# Altium PCB CT310高端控制盒基板电路V1.0.PcbDoc (part 3 of 8)
Units mil, origin at the board's own origin, x right, y up, seen from the top; angles counter-clockwise.
Board outline 8162.61 x 6196.81 mil, 2 copper layers (Top Layer, Bottom Layer), stack 65.792 mil thick; 265 components, 178 nets, 926 pads, 298 vias.
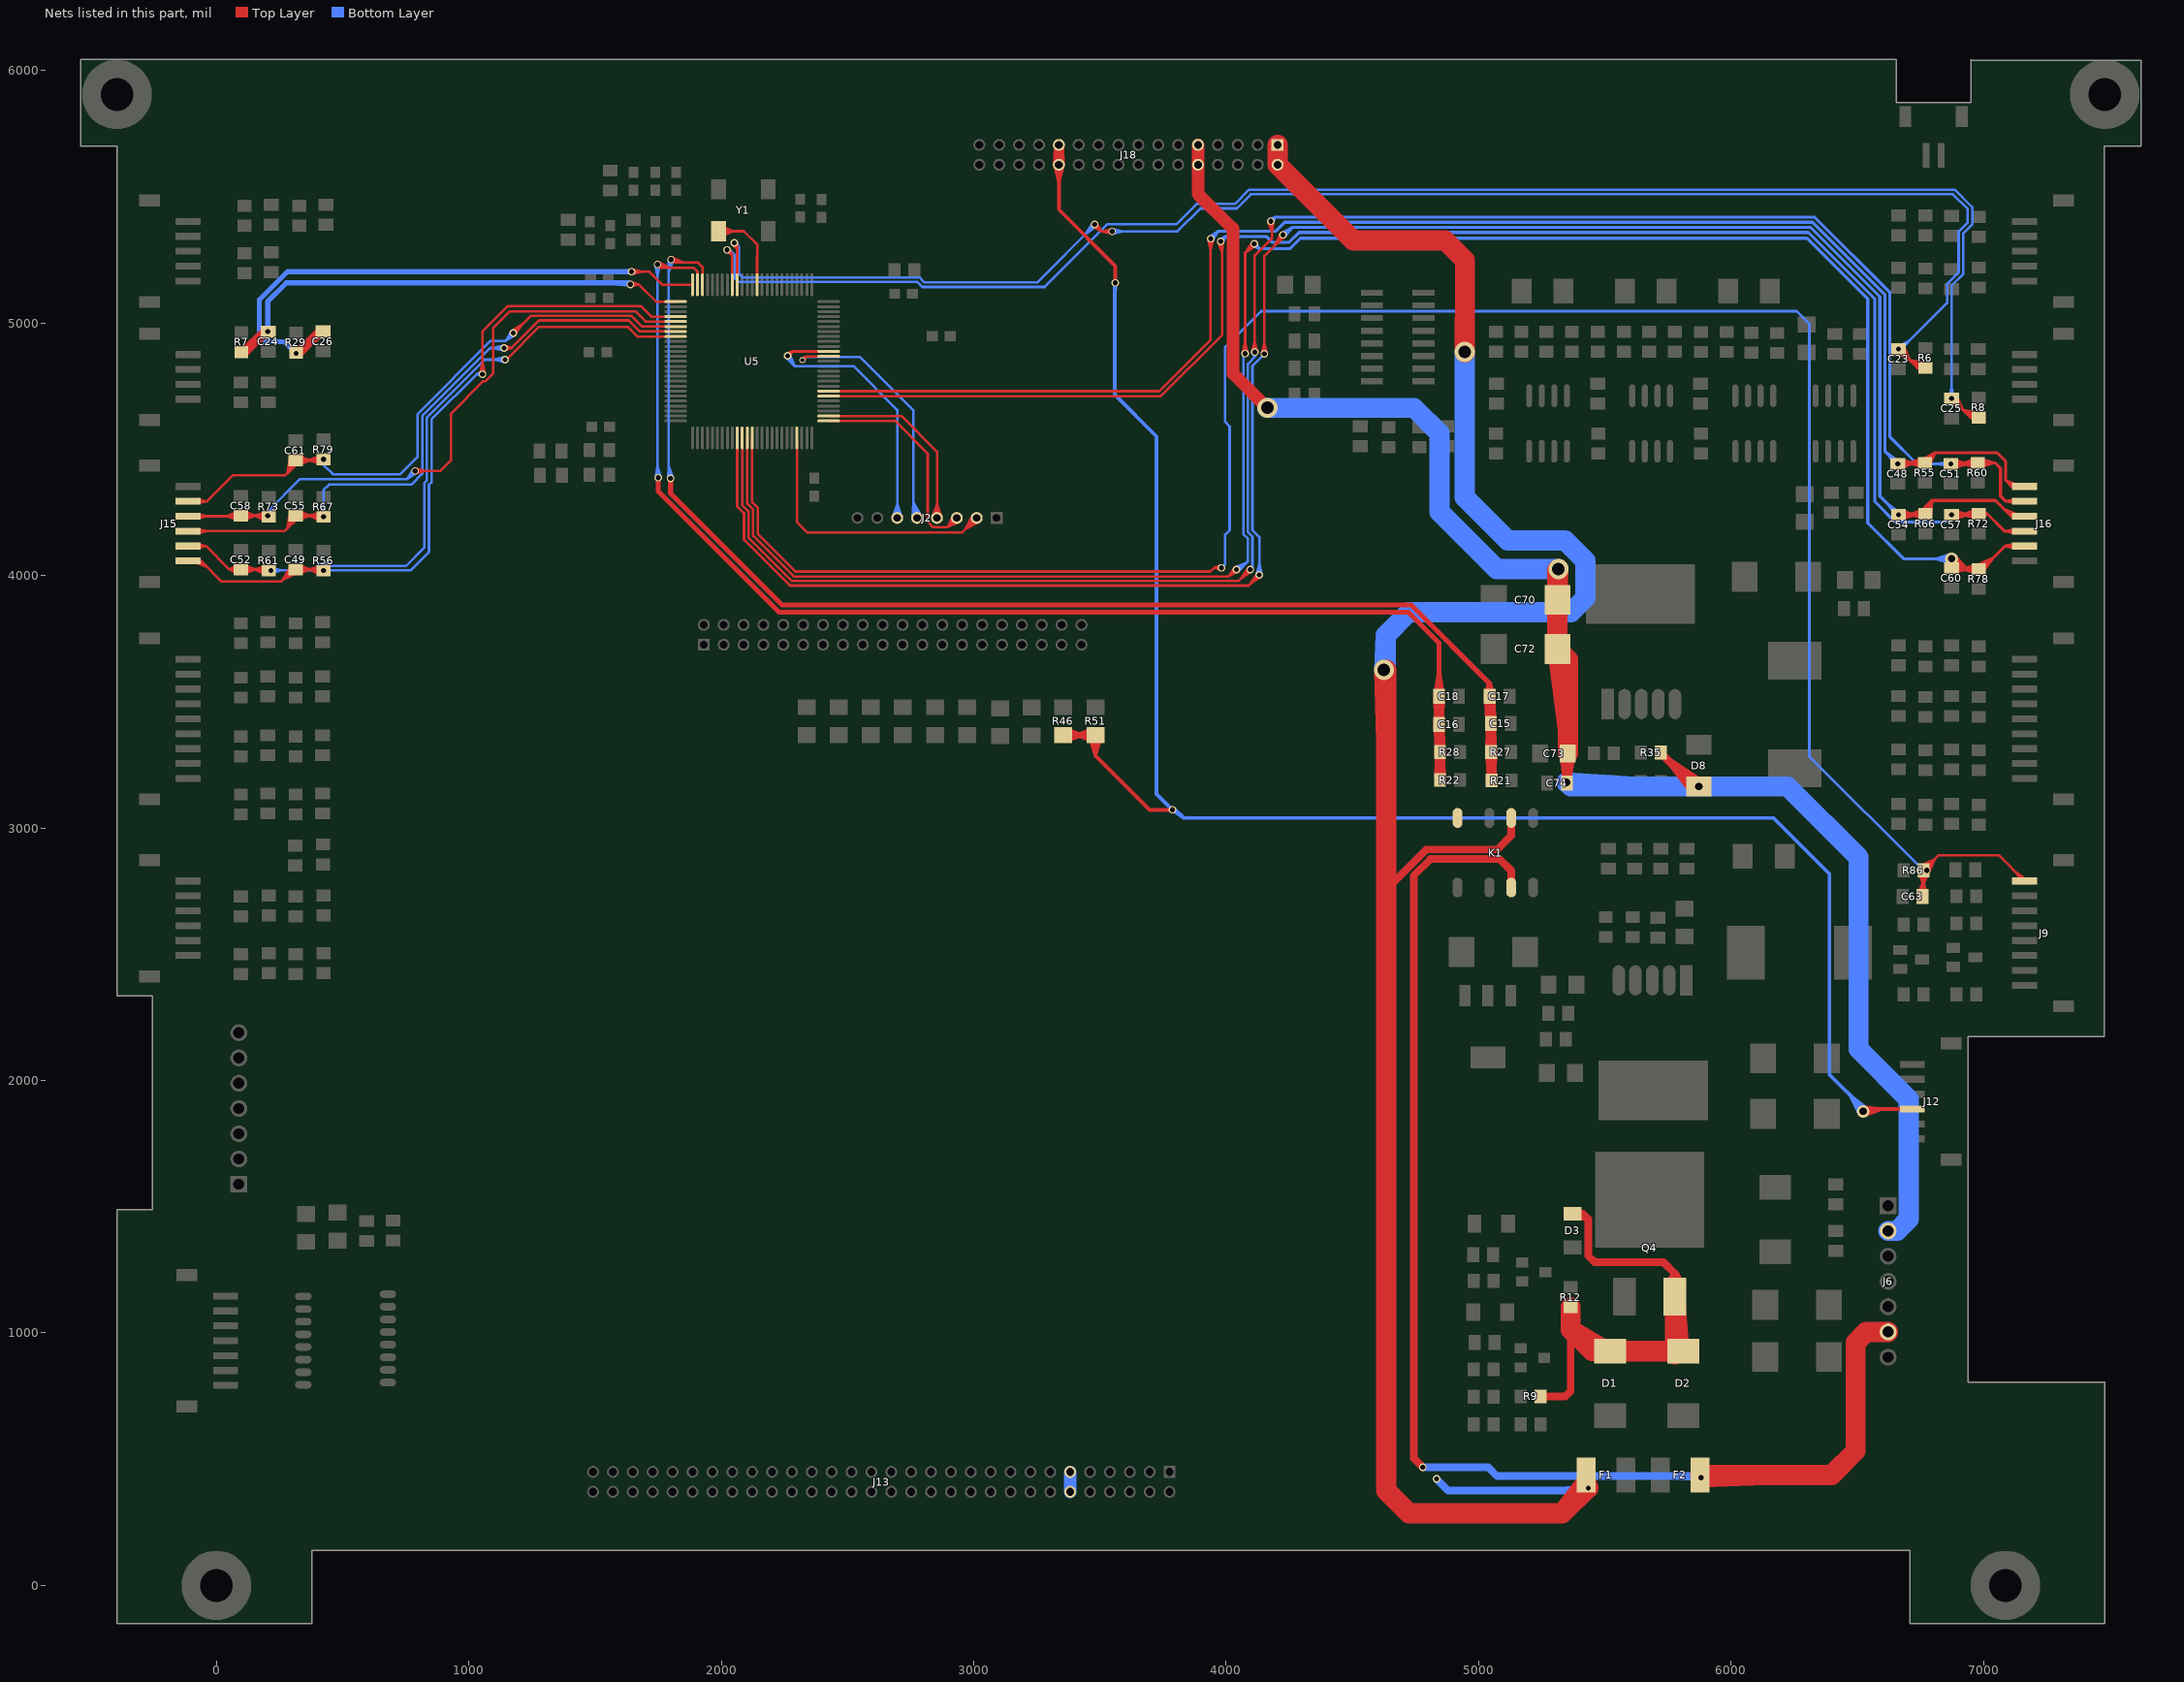
[diagram p3: the nets of this part, all layers, seen from the top]

## Via types
v1: diameter 30, hole 20, Top Layer to Bottom Layer, tented both sides, 226 vias
v2: diameter 60, hole 30, Top Layer to Bottom Layer, tented both sides, 32 vias
v3: diameter 50, hole 30, Top Layer to Bottom Layer, tented both sides, 20 vias
v4: diameter 80, hole 50, Top Layer to Bottom Layer, tented both sides, 10 vias
v5: diameter 50, hole 28, Top Layer to Bottom Layer, tented both sides, 8 vias
v6: diameter 24, hole 16, Top Layer to Bottom Layer, tented both sides, 1 vias
v7: diameter 30, hole 16, Top Layer to Bottom Layer, tented both sides, 1 vias

## Nets (pads, with @x,y where several pads share a name; then routed paths per layer and width w, separated by ;. In a path a pad name is that pad's centre, name@x,y a point inside that pad or via, vN(x,y) a via of type N, cw(c..) or ccw(c..) an arc to the next point about the centre after c; other vN are vias at no path point) (continued)
+7.2V_S: C70.1 C72.1 C73.1 C74.2 D8.2 J6.2 J18.9 J18.10 R35.1 | length 12030.7
  Top Layer w30: R35.1@5721.67,3294.36 5808.93,3211.03 ; R35.1@5721.67,3298.3 5855.34,3164.62 v3(5872.3,3164.62) ; 5768.56,3248 v3(5872.3,3164.62) ; 5775.01,3244.95 v3(5872.3,3164.62) ; 5776.87,3249.68 v3(5872.3,3164.62) ; 5777.49,3243.81 v3(5872.3,3164.62) ; D8.2@5862.45,3164.62 5757.78,3262.18 ; D8.2@5877.49,3183.8 5757.78,3262.18 ; v3(5348.3,3181.3) 5369.81,3289.52 C74.2@5349.67,3184.2 ; v3(5348.3,3181.3) 5369.81,3289.56 C74.2@5349.67,3181.3 ; v3(5348.3,3181.3) C73.1@5353.41,3291.36 ; v3(5348.3,3181.3) 5336.93,3290.67 C74.2@5349.67,3184.2 ; v3(5348.3,3181.3) C73.1@5353.41,3291.36 ; v3(5348.3,3181.3) 5336.93,3290.68 C74.2@5349.67,3181.3 ; v3(5348.3,3181.3) C73.1@5349.67,3291.55 ; v3(5348.3,3181.3) C73.1@5349.67,3291.55 ; C74.2@5349.67,3181.3 C73.1@5353.41,3291.36 ; C74.2@5349.67,3181.3 C73.1@5349.67,3291.55 ; C74.2@5349.67,3184.2 C73.1@5353.41,3291.36 ; C74.2@5349.67,3184.2 C73.1@5349.67,3291.55 ; 5757.78,3262.18 5844.38,3148.27 v3(5872.3,3164.62)
  Top Layer w50: J18.10@3888.4,5626.93 J18.9@3888.4,5705.67 J18.10@3888.4,5626.93 ; J18.10@3888.4,5626.93 3888.4,5510.6 4023,5376 4027,5376 4027,4800 ; 4027,4800 v4(4163,4664) 4027,4800
  Top Layer w80: C72.1@5311.98,3701.13 5353.41,3387.92 ; C73.1@5353.41,3295.3 5353.41,3667.57 C72.1@5311.98,3709 ; C73.1@5353.41,3299.23 5353.41,3570.73 ; C72.1@5311.98,3709 5311.98,3895.42 5311.98,3716.87 C70.1@5311.98,3903.3 ; C72.1@5311.98,3709 C70.1@5311.98,3903.3 ; C70.1@5311.98,3903.3 v4(5316,4026) ; C70.1@5311.98,3903.3 v4@5311.98,4021.98 ; v4@5311.98,4021.98 5311.98,3911.17 v4(5316,4026) ; v4@5311.98,4021.98 v4(5316,4026)
  Bottom Layer w80: v4(4163,4664) 4744,4664 4845,4563 4845,4252 5071,4026 ; 5607.3,3164.62 v3(5872.3,3164.62) ; 5622.9,3164.62 v3(5348.3,3181.3) 5364.97,3164.62 v3(5872.3,3164.62) ; 5071,4026 v4(5316,4026) 5071,4026 ; v3(5872.3,3164.62) 6223.41,3164.62 6505,2883.02 6505,2124.02 6703.46,1925.56 6703.46,1450.65 6656.81,1404 ; 6656.81,1404 J6.2@6622,1404 6656.81,1404
BAT1+: F1.1 J18.1 J18.2 K1.6 | length 10438.7
  Top Layer w30: 4634,2755.74 4793.26,2915 5074,2915 5128.99,2969.99 ; K1.6@5128.99,3020.11 5128.99,2969.99 ; K1.6@5128.99,3039.8 5128.99,2969.99
  Top Layer w80: v4(4625,3626) 4634,3345.09 ; v4@4634,3626 4634,2755.74 4634,375.55 4724.55,285 5331,285 ; 4946,5165.01 v4(4945,4885) 4946,4884 4946,5248 4867,5327 4503.29,5327 J18.2@4203.37,5626.93 ; F1.1@5426.55,380.55 5331,285 ; J18.2@4203.37,5626.93 J18.1@4203.37,5705.67 J18.2@4203.37,5626.93 ; 5331,285 v1(5434,385) ; 5331,285 v1(5434,385) ; 5331,285 5426.55,405.8 v1(5434,385)
  Bottom Layer w30: v1(4833,422) 4879,376 5425,376 v1(5434,385) 5324.38,376
  Bottom Layer w80: v4(4945,4885) 4945,4309 5115,4139 5342,4139 5423,4058 5423,3911 5366,3854 4723,3854 4632,3763 ; 4632,3763 v4(4625,3626) 4632,3633 4632,3763
BAT1_ADC: C15.1 C17.1 R21.2 R27.2 U5.23 | length 9670.8
  Top Layer w10: v1@1799.63,5241.09 1849.07,5239.3 ; v1@1804.34,5260.43 1849.07,5239.3 ; U5.23@1925.45,5151.44 1925.45,5222.14 ; U5.23@1925.45,5190.69 1925.45,5222.14 ; v1(1801,5251) 1816.7,5239.3 ; v1(1801,5251) 1849.07,5239.3 ; v1(1801,5251) 1816.7,5239.3 ; v1(1801,5251) 1805,5251 1816.7,5239.3 ; 1816.7,5239.3 1797.27,5241.72 1816.7,5239.3 ; 1816.7,5239.3 1808.82,5257.23 1816.7,5239.3 ; 1816.7,5239.3 1908.3,5239.3 1925.45,5222.14
  Top Layer w20: C17.1@5029.87,3529.26 5043.33,3572.26 ; C17.1@5029.92,3513.03 C15.1@5051.33,3430.57 ; C15.1@5034.72,3419.68 C17.1@5044.48,3503.28 ; C15.1@5034.79,3417.75 C17.1@5032.51,3503.05 ; C15.1@5034.81,3405.8 R27.2@5051.33,3323.65 ; C15.1@5034.81,3420.79 C17.1@5051.33,3502.9 ; C15.1@5034.92,3421.56 C17.1@5056.1,3502.68 ; R27.2@5035.72,3296.66 R21.2@5040.64,3210.85 ; R27.2@5035.73,3303.53 C15.1@5038.09,3389.49 ; R27.2@5035.75,3305.28 C15.1@5049.02,3388.38 ; R27.2@5035.79,3305.66 C15.1@5051.33,3387.91 ; R27.2@5035.99,3306.97 C15.1@5059.49,3387.52 ; R27.2@5036.06,3293.28 R21.2@5061.68,3212.99 ; R21.2@5037.76,3193.34 R27.2@5051.33,3275.85 ; C17.1@5043.33,3515.39 C15.1@5051.33,3430.57 ; C17.1@5043.33,3527.2 5043.33,3572.26 ; C15.1@5048.33,3407.39 R27.2@5051.33,3323.65 ; R21.2@5051.33,3188.3 5051.33,3513.3 C17.1@5043.33,3521.3 5043.33,3572.26 ; R21.2@5051.33,3192.23 R27.2@5051.33,3275.85 ; C17.1@5056.8,3529.26 5043.33,3572.26 ; C17.1@5056.96,3515.58 C15.1@5051.33,3430.57 ; C15.1@5061.48,3422.79 C17.1@5032.51,3503.05 ; C15.1@5061.85,3420.92 C17.1@5044.48,3503.28 ; C15.1@5061.94,3406.77 R27.2@5051.33,3323.65 ; C15.1@5061.94,3419.82 C17.1@5051.33,3502.9 ; C15.1@5061.96,3419.04 C17.1@5056.1,3502.68 ; R27.2@5062.66,3307.08 C15.1@5038.09,3389.49 ; R27.2@5062.73,3293.91 R21.2@5040.64,3210.85 ; R27.2@5062.93,3297.26 R21.2@5061.68,3212.99 ; R27.2@5062.95,3303.69 C15.1@5059.49,3387.52 ; R27.2@5062.93,3305.02 C15.1@5051.33,3387.91 ; R27.2@5062.91,3305.39 C15.1@5049.02,3388.38 ; R21.2@5064.91,3193.34 R27.2@5051.33,3275.85 ; 1799,4324.46 v1(1799,4385) 1799,4324.46 ; 1799,4324.46 2240.46,3883 4732.6,3883 5043.33,3572.26 ; C17.1@5032.51,3503.05 C15.1@5048.33,3419.2 ; C15.1@5038.09,3389.49 R27.2@5049.33,3304.23 ; R21.2@5040.64,3210.85 R27.2@5049.33,3296.36 ; C17.1@5044.48,3503.28 C15.1@5048.33,3419.2 ; C15.1@5048.33,3419.2 C17.1@5051.33,3502.9 ; C15.1@5048.33,3419.2 C17.1@5056.1,3502.68 ; C15.1@5049.02,3388.38 R27.2@5049.33,3304.23 ; R27.2@5049.33,3296.36 R21.2@5051.33,3212.7 ; R27.2@5049.33,3296.36 R21.2@5051.33,3212.4 ; R27.2@5049.33,3296.36 R21.2@5061.68,3212.99 ; R27.2@5049.33,3304.23 C15.1@5059.49,3387.52 ; R27.2@5049.33,3304.23 C15.1@5051.33,3387.91 ; R21.2@5051.33,3212.4 5035.79,3294.93 R21.2@5051.33,3212.7 ; R21.2@5051.33,3212.4 5062.93,3295.58 R21.2@5051.33,3212.7
  Bottom Layer w10: v1@1789.01,4384.59 1792,4433.13 ; v1@1791.03,5251.8 1792,5201.31 ; v1(1799,4385) 1792,4433.13 ; v1@1801,4385 1792,4394 1792,5242 v1(1801,5251) 1792,5201.31 ; v1@1808.7,4387.45 1792,4433.13 ; v1@1810.61,5248.25 1792,5201.31
BAT2+: F2.1 J6.6 K1.3 | length 6151.2
  Top Layer w30: v1(4779,468) 4742.63,504.37 4742.63,2810.63 4809,2877 5083,2877 5128.99,2831.01 ; K1.3@5128.99,2764.2 5128.99,2831.01 ; K1.3@5128.99,2783.89 5128.99,2831.01
  Top Layer w80: F2.1@5877.03,437.3 6154.44,437.3 ; F2.1@5881,437.3 6398.3,437.3 6493,532 6493,962 6535,1004 J6.6@6622,1004 ; 6138.35,437.3 v1(5881,427) 6139.03,437.3
  Bottom Layer w30: v1(4779,468) 5038,468 5073,433 5875,433 v1(5881,427) 5774.24,433
BAT2_ADC: C16.1 C18.1 R22.2 R28.2 U5.24 | length 9443.5
  Top Layer w10: v1@1745.28,5222.15 1796.39,5218.3 ; v1@1746,5232 v1(1747,5232) 1796.39,5218.3 ; v1@1746.5,5231.5 1759.7,5218.3 1891.3,5218.3 1905.76,5203.83 ; v1@1750.6,5241.33 1796.39,5218.3 ; U5.24@1905.76,5151.44 1905.76,5203.83 ; U5.24@1905.76,5190.69 1905.76,5203.83
  Top Layer w20: v1(1750,4387) 1750,4333.86 2228.86,3855 4721,3855 4843.33,3732.67 C18.1@4843.33,3521.3 4847.27,3517.36 R28.2@4847.27,3301.28 R22.2@4847.27,3190.3 ; C16.1@4829.71,3404.51 R28.2@4835.83,3319.31 ; C18.1@4829.73,3516.04 C16.1@4832.43,3430.21 ; C18.1@4829.77,3514.18 C16.1@4844.03,3430.95 ; C18.1@4829.76,3528.31 4843.33,3610.82 ; C16.1@4829.82,3417.95 C18.1@4847.27,3499.97 ; C18.1@4829.82,3513.65 C16.1@4847.27,3431.54 ; C18.1@4830.05,3512.39 C16.1@4855.14,3432.22 ; C16.1@4830.17,3400.89 R28.2@4858.33,3321.62 ; R22.2@4833.66,3193.62 R28.2@4836.65,3278.29 ; R28.2@4833.69,3296.24 R22.2@4847.27,3213.73 ; R28.2@4833.69,3306.33 C16.1@4847.27,3388.84 ; R22.2@4833.94,3197.02 R28.2@4857.9,3278.29 ; C16.1@4843.33,3416.21 C18.1@4847.27,3499.97 ; C18.1@4843.33,3527.2 4843.33,3610.82 ; R28.2@4847.27,3297.35 R22.2@4847.27,3213.73 ; R28.2@4847.27,3305.22 C16.1@4847.27,3388.84 ; C18.1@4856.67,3512.59 C16.1@4832.43,3430.21 ; C16.1@4856.77,3402.13 R28.2@4835.83,3319.31 ; C16.1@4856.89,3405.74 R28.2@4858.33,3321.62 ; C16.1@4856.95,3416.68 C18.1@4847.27,3499.97 ; C18.1@4856.92,3514.4 C16.1@4844.03,3430.95 ; C18.1@4856.95,3514.92 C16.1@4847.27,3431.54 ; C18.1@4856.93,3516.2 C16.1@4855.14,3432.22 ; C18.1@4856.91,3528.31 4843.33,3610.82 ; R22.2@4860.61,3197.02 R28.2@4836.65,3278.29 ; R28.2@4860.85,3296.24 R22.2@4847.27,3213.73 ; R28.2@4860.85,3306.33 C16.1@4847.27,3388.84 ; R22.2@4860.88,3193.62 R28.2@4857.9,3278.29 ; C16.1@4832.43,3430.21 C18.1@4843.33,3515.39 ; R28.2@4835.83,3319.31 C16.1@4843.33,3404.4 ; R28.2@4836.65,3278.29 R22.2@4847.27,3194.23 ; C16.1@4843.33,3404.4 R28.2@4847.27,3320.64 ; C16.1@4843.33,3404.4 R28.2@4847.27,3320.3 ; C16.1@4843.33,3404.4 R28.2@4858.33,3321.62 ; C18.1@4843.33,3515.39 C16.1@4847.27,3431.54 ; C18.1@4843.33,3515.39 C16.1@4844.03,3430.95 ; C18.1@4843.33,3515.39 C16.1@4855.14,3432.22 ; R22.2@4847.27,3194.23 R28.2@4847.27,3277.85 ; R22.2@4847.27,3194.23 R28.2@4857.9,3278.29 ; R22.2@4847.27,3194.23 R28.2@4847.27,3277.85 ; R28.2@4847.27,3277.85 4860.85,3195.34 R28.2@4847.27,3277.85 ; R28.2@4847.27,3277.85 4833.69,3195.34 R28.2@4847.27,3277.85 ; R28.2@4847.27,3320.3 4829.82,3402.66 R28.2@4847.27,3320.64 ; R28.2@4847.27,3320.3 4856.95,3403.93 R28.2@4847.27,3320.64
  Bottom Layer w10: v1@1737.06,5230.89 1747,5187 v1@1756.94,5230.89 ; v1@1740.01,4387.44 1747,4432.29 ; v1@1747,4387 v1(1747,5232) ; v1(1750,4387) 1747,4432.29 ; v1@1759.84,4388.76 1747,4432.29
BAT_IN: D1.2 D2.2 D3.2 Q4.3 R9.2 R12.1 | length 3830.8
  Top Layer w30: R9.2@5245.67,748.3 5343.3,748.3 5364.41,769.41 5364.41,1012.4 ; D3.2@5371.3,1472.22 5412.78,1472.22 ; Q4.3@5747.57,1180.53 5777.3,1235.3 ; Q4.3@5777.3,1143.65 5777.3,1235.3 ; Q4.3@5777.3,1172.98 5777.3,1235.3 ; Q4.3@5807.02,1180.53 5777.3,1235.3 ; D3.2@5379.17,1472.22 5412.78,1472.22 ; D3.2@5379.17,1472.22 5412.78,1472.22 ; D3.2@5379.17,1472.22 5434,1451 ; 5412.78,1472.22 5434,1451 ; 5434,1451 5434,1306 5459.7,1280.3 5732.3,1280.3 5777.3,1235.3
  Top Layer w80: D1.2@5520.29,928.25 5448.56,928.25 ; 5364.41,1012.4 D1.2@5506.51,928.25 ; 5364.41,1012.4 R12.1@5364.41,1101.99 5364.41,1012.4 ; 5364.41,1012.4 5448.56,928.25 ; 5448.56,928.25 D1.2@5506.51,928.25 ; 5448.56,928.25 D1.2@5506.51,928.25 ; D2.2@5796.52,928.25 5534.07,928.25 5782.3,927.25 5552.29,927.25 D2.2@5796.52,928.25 ; D2.2@5796.52,928.25 Q4.3@5777.3,1143.65 5777.3,915.25 5777.3,1114.32 D2.2@5796.52,928.25
CLOCK: U5.12 Y1.3 | length 608.9
  Top Layer w10: Y1.3@1988.87,5363.62 2088.98,5363.62 2143,5309.6 2143,5265.4 2141.98,5264.38 U5.12@2141.98,5151.44 ; Y1.3@1990.64,5349.2 2048.4,5363.62 ; Y1.3@1990.64,5378.04 2048.4,5363.62 ; Y1.3@1993.92,5339.62 2048.4,5363.62 ; Y1.3@1993.92,5387.62 2048.4,5363.62 ; U5.12@2141.98,5190.69 2141.98,5226.44
CVBS: J12.4 J18.23 J18.24 R46.2 R51.2 | length 10038.4
  Top Layer w15: J18.24@3321.16,5625.56 J18.23@3323.37,5694.78 ; J18.24@3321.21,5625.03 3337.22,5558.3 J18.24@3353.23,5625.03 ; J18.24@3321.21,5628.82 3337.22,5695.55 J18.24@3353.23,5628.82 ; J18.23@3321.21,5703.77 3337.22,5637.04 J18.23@3353.23,5703.77 ; J18.24@3321.91,5631.97 J18.23@3351.08,5694.78 ; J18.23@3337.22,5705.67 J18.24@3337.22,5626.93 ; J18.24@3352.54,5631.97 J18.23@3323.37,5694.78 ; J18.24@3353.29,5625.56 J18.23@3351.08,5694.78 ; R46.2@3354.92,3367.88 R51.2@3482,3367.88 3482,3285.88 3696.88,3071 3786,3071 v1(3787,3072) 3726.98,3071 ; R46.2@3358.86,3367.88 3435.35,3367.88 ; R46.2@3359.39,3358.9 3435.35,3367.88 ; R46.2@3359.39,3376.86 3435.35,3367.88 ; R46.2@3362.62,3344.18 3435.35,3367.88 ; R46.2@3362.62,3391.58 3435.35,3367.88 ; R51.2@3458.3,3364.12 3482,3291.39 ; R51.2@3473.02,3367.35 3482,3291.39 ; R51.2@3474.3,3344.18 3401.57,3367.88 ; R51.2@3474.3,3391.58 3401.57,3367.88 ; R51.2@3477.53,3358.9 3401.57,3367.88 ; R51.2@3477.53,3376.86 3401.57,3367.88 ; R51.2@3478.06,3367.88 3401.57,3367.88 ; R51.2@3490.98,3367.35 3482,3291.39 ; R51.2@3505.7,3364.12 3482,3291.39 ; v1(3561,5159) 3561,5219 ; v1@3561,5163.87 3561,5225.27 3337.22,5449.04 J18.24@3337.22,5626.93 ; v3@6523.07,1895.5 6594.57,1886.47 ; v3@6527.15,1861 6594.57,1886.47 ; 6623.02,1886.47 J12.4@6681.8,1886.47 ; J12.4@6717.23,1886.47 6531.47,1886.47 v3(6523,1878) 6594.57,1886.47 ; J18.23@3323.37,5694.78 J18.24@3337.22,5626.93 ; J18.24@3337.22,5626.93 J18.23@3351.08,5694.78
  Bottom Layer w15: 3558.5,5098.79 v1(3561,5159) ; v1@3560,5159 3558.5,5157.5 3558.5,4716.5 3724.5,4550.5 3724.5,3134.5 v1(3787,3072) ; 3740.18,3118.82 v1(3787,3072) ; v1@3788,3076 3795.94,3076 3832.44,3039.5 ; v3@6508.27,1868.55 6472.54,1940.46 ; v3@6535.33,1890.42 6472.54,1940.46 ; v1(3787,3072) 3832.44,3039.5 ; 3832.44,3039.5 6168.44,3039.5 6389.5,2818.44 6389.5,2023.5 6523,1890 v3(6523,1878) 6472.54,1940.46
DC33V: J13.11 J13.12 | length 78.7
  Bottom Layer w50: J13.12@3381.96,370.69 J13.11@3381.96,449.43
GND_P: K1.8
JNRST: J2.6 U5.90 | length 1580.4
  Top Layer w10: v1@2257.49,4878.34 2280.66,4887.66 ; v1(2263,4870) 2280.66,4887.66 ; v1@2271.34,4864.49 2280.66,4887.66 ; 2350.44,4887.66 U5.90@2386.19,4887.66 ; U5.90@2425.44,4887.66 2280.66,4887.66
  Bottom Layer w10: v1@2255.36,4863.55 2291.65,4828.35 ; v1@2271.76,4874.82 2291.65,4828.35 ; J2.6@2678.55,4231.23 2696.89,4281.62 ; J2.6@2688.3,4228.69 2696.89,4281.62 ; J2.6@2696.89,4228 2696.89,4656.11 2524,4829 2332.36,4829 2331.65,4828.3 2291.7,4828.3 2263,4857 v1(2263,4870) 2291.65,4828.35 ; J2.6@2705.48,4228.69 2696.89,4281.62 ; J2.6@2715.23,4231.23 2696.89,4281.62
JOYSTICK_LEFTX: C23.1 R6.1 U5.16 | length 8616.4
  Top Layer w10: v1@2043.75,5312.35 2063.24,5292.76 ; v1@2061.72,5320.35 2063.24,5292.76 ; U5.16@2063.24,5151.44 2063.24,5292.76 ; U5.16@2063.24,5190.69 2063.24,5226.44 ; v1@3472.92,5382.06 3506,5363 ; v1(3479,5390) 3506,5363 ; v1@3486.94,5396.08 3506,5363 ; v1@3546.81,5353.07 3506,5363 ; v1@3546.81,5372.93 3506,5363 ; C23.1@6656.59,4889.3 6700.26,4856.62 ; C23.1@6656.81,4889.11 6699.19,4859.58 ; C23.1@6656.95,4889 6699.51,4860.51 C23.1@6671.02,4903.07 ; C23.1@6657.07,4888.9 6700.37,4860.83 ; C23.1@6657.18,4888.82 6703.23,4859.55 ; C23.1@6657.23,4882.46 6708.13,4851.89 ; C23.1@6663.12,4890.62 6708.13,4851.89 ; C23.1@6669.2,4896.73 6708.13,4851.89 ; C23.1@6670.75,4903.39 6703.23,4859.55 ; C23.1@6670.92,4903.2 6700.37,4860.83 ; C23.1@6671.13,4902.95 6699.19,4859.58 ; C23.1@6671.24,4902.8 6700.26,4856.62 ; C23.1@6676.1,4901.89 6708.13,4851.89 ; C23.1@6685,4906.58 6708.13,4851.89 ; R6.1@6755.47,4806.8 6706.69,4853.33 ; R6.1@6761.84,4814.57 6706.69,4853.33 ; R6.1@6769.86,4829.79 6706.69,4853.33 ; R6.1@6770.28,4821.92 6738.1,4821.92 ; R6.1@6772.66,4839.44 6706.69,4853.33 ; 2063.24,5292.76 v1(2052,5318) 2052,5304 2063.24,5292.76 ; 3506,5363 v1(3548,5363) 3506,5363 ; v1(6663.3,4896.73) 6699.19,4859.58 ; v1(6663.3,4896.73) 6700.26,4856.62 ; v1(6663.3,4896.73) 6700.37,4860.83 ; v1(6663.3,4896.73) 6703.23,4859.55 ; v1(6663.3,4896.73) 6738.1,4821.92 ; 6706.69,4853.33 R6.1@6766.34,4821.92 ; 6738.1,4821.92 R6.1@6766.34,4821.92 ; 6738.1,4821.92 6765.02,4830.45 6738.1,4821.92 ; 6738.1,4821.92 6765.02,4813.4 6738.1,4821.92 ; 6738.1,4821.92 6760.2,4839.5 6738.1,4821.92 ; 6738.1,4821.92 6760.2,4804.34 6738.1,4821.92 ; 6738.1,4821.92 R6.1@6766.34,4821.92
  Bottom Layer w10: v1@2046.46,5309.68 2070,5300 ; v1(2052,5318) 2070,5300 ; v1@2060.32,5323.54 2070,5300 ; v1@3471.19,5396.24 3443.31,5353.31 ; v1@3485.45,5382.36 3443.31,5353.31 ; v1(3548,5363) 3807,5363 3898,5454 4042.11,5454 4098.11,5510 6878.49,5510 6937.32,5451.18 6937.32,5398.16 6901.32,5362.16 6901.32,5201.07 6855.32,5155.07 6855.32,5078.79 6673.25,4896.73 v1(6663.3,4896.73) 6705.14,4928.61 ; v1@3549.11,5353.06 3593,5363 v1@3549.11,5372.94 ; v1@6658.02,4905.22 6705.14,4928.61 ; v1@6670.09,4889.39 6705.14,4928.61 ; 2070,5300 2070,5194 2083.71,5180.29 2784.14,5180.29 2803.44,5161 3251,5161 3479,5389 v1(3479,5390) 3443.31,5353.31
JOYSTICK_LEFTY: C25.1 R8.1 U5.17 | length 8257.1
  Top Layer w10: v1@2017.25,5281.82 2043.56,5269.44 ; v1(2023,5290) 2043.56,5269.44 ; v1@2031.18,5295.75 2043.56,5269.44 ; U5.17@2043.56,5151.44 2043.56,5269.44 ; U5.17@2043.56,5190.69 2043.56,5226.44 ; C25.1@6866.61,4693.31 6910.28,4660.62 ; C25.1@6866.83,4693.12 6909.21,4663.58 ; C25.1@6866.97,4693 6909.53,4664.52 C25.1@6881.04,4707.08 ; C25.1@6867.09,4692.9 6910.39,4664.83 ; C25.1@6867.25,4686.47 6918.15,4655.89 ; C25.1@6867.2,4692.82 6913.25,4663.55 ; C25.1@6873.14,4694.62 6918.15,4655.89 ; C25.1@6879.22,4700.73 6918.15,4655.89 ; C25.1@6880.77,4707.39 6913.25,4663.55 ; C25.1@6880.94,4707.2 6910.39,4664.83 ; C25.1@6881.15,4706.95 6909.21,4663.58 ; C25.1@6881.26,4706.8 6910.28,4660.62 ; C25.1@6886.12,4705.89 6918.15,4655.89 ; C25.1@6895.02,4710.58 6918.15,4655.89 ; R8.1@6965.49,4610.8 6916.71,4657.33 ; R8.1@6971.86,4618.57 6916.71,4657.33 ; R8.1@6979.88,4633.8 6916.71,4657.33 ; R8.1@6980.3,4625.93 6948.12,4625.93 ; R8.1@6982.68,4643.44 6916.71,4657.33 ; v1(6873.32,4700.73) 6910.39,4664.83 ; v1(6873.32,4700.73) 6909.21,4663.58 ; v1(6873.32,4700.73) 6913.25,4663.55 ; v1(6873.32,4700.73) 6910.28,4660.62 ; v1(6873.32,4700.73) 6948.12,4625.93 ; 6916.71,4657.33 R8.1@6976.36,4625.93 ; 6948.12,4625.93 R8.1@6976.36,4625.93 ; 6948.12,4625.93 6975.04,4634.45 6948.12,4625.93 ; 6948.12,4625.93 6975.04,4617.4 6948.12,4625.93 ; 6948.12,4625.93 6970.22,4643.51 6948.12,4625.93 ; 6948.12,4625.93 6970.22,4608.34 6948.12,4625.93 ; 6948.12,4625.93 R8.1@6976.36,4625.93
  Bottom Layer w10: v1@2018.55,5281.05 2052,5270 ; v1@2029.79,5297.34 2052,5270 ; v1@6863.38,4701.84 6873.32,4745.73 v1@6883.25,4701.84 ; v1(6873.32,4700.73) 6873.32,5147.61 6919.32,5193.61 6919.32,5354.7 6955.32,5390.7 6955.32,5458.63 6885.95,5528 4090.65,5528 4034.65,5472 3883,5472 3802,5391 3528.6,5391 3280.6,5143 2795.98,5143 2776.69,5162.29 2068.71,5162.29 2052,5179 2052,5270 ; 2052,5270 v1(2023,5290) 2032,5290 2052,5270
JOYSTICK_RIGHTX: C24.1 R7.1 U5.26 | length 3548.1
  Top Layer w10: v1(1640,5153) 1673,5153 ; v1@1641.52,5143.12 1673,5153 ; v1@1641.52,5162.88 1673,5153 ; 1744.15,5084.51 U5.26@1779.9,5084.51 ; U5.26@1819.15,5084.51 1741.49,5084.51 1673,5153
  Top Layer w20: R7.1@96.02,4896.48 C24.1@182.19,4942.21 ; R7.1@99.29,4884.93 124.91,4884.93 C24.1@205.65,4965.67 ; R7.1@103.23,4884.93 C24.1@182.19,4942.21 ; R7.1@111.98,4874.48 C24.1@182.19,4942.21 ; 132.73,4920.38 v1(203.33,4965.67) ; 137.02,4918.02 v1(203.33,4965.67) ; 137.12,4913.26 v1(203.33,4965.67) ; 138.43,4921.92 v1(203.33,4965.67) ; 141.09,4911.44 v1(203.33,4965.67) ; 141.89,4914.96 v1(203.33,4965.67) ; 147.25,4907.27 v1(203.33,4965.67) ; C24.1@190.05,4975.24 128.71,4903.41 ; C24.1@191.06,4976.16 122.34,4910.45 ; C24.1@206.84,4954.04 122.34,4910.45 ; C24.1@207.96,4954.8 128.71,4903.41 ; 122.34,4910.45 199.74,4965.67 128.71,4903.41
  Bottom Layer w20: v1(203.33,4965.67) 203.33,5085.33 277,5159 1634,5159 v1(1640,5153) 1563.22,5159
JOYSTICK_RIGHTY: C26.1 R29.1 U5.25 | length 3878.1
  Top Layer w10: v1(1645,5203) 1716,5203 1767.56,5151.44 U5.25@1886.08,5151.44 1850.33,5151.44 ; v1@1646.11,5193.06 1690,5203 v1@1646.11,5212.94
  Top Layer w20: R29.1@312.44,4894.34 396.72,4941.09 ; R29.1@319.88,4882.93 396.72,4941.09 ; R29.1@328.85,4872.67 396.72,4941.09 ; 378.78,4927.51 v1(315.94,4879.94) ; 381.3,4932.54 v1(315.94,4879.94) ; 384.2,4928.57 v1(315.94,4879.94) ; 384.3,4928.57 v1(315.94,4879.94) ; C26.1@406.5,4976.03 347.58,4903.9 ; C26.1@407.39,4976.89 343.28,4911.44 ; C26.1@422.3,4966.67 R29.1@338.55,4882.93 ; C26.1@423.77,4955.22 343.28,4911.44 ; C26.1@424.81,4955.96 347.58,4903.9 ; v1(315.94,4879.94) R29.1@338.55,4882.93 ; v1(315.94,4879.94) R29.1@338.55,4882.93 ; v1(315.94,4879.94) R29.1@315.94,4882.93 R29.1@338.55,4882.93 ; 343.28,4911.44 C26.1@416.39,4966.67 ; 347.58,4903.9 C26.1@416.39,4966.67 ; 396.72,4941.09 C26.1@416.39,4966.67 ; 396.72,4941.09 C26.1@404.08,4972.5 ; 396.72,4941.09 C26.1@425.19,4956.27 ; 396.72,4941.09 C26.1@416.39,4966.67 ; 396.72,4941.09 C26.1@404.08,4972.5 ; 396.72,4941.09 C26.1@425.19,4956.27 ; 396.72,4941.09 C26.1@416.39,4966.67 ; 396.72,4941.09 C26.1@404.08,4972.5 ; 396.72,4941.09 C26.1@425.19,4956.27
  Bottom Layer w20: v1(315.94,4879.94) 269.88,4926 196.33,4926 170.33,4952 170.33,5091.93 281.4,5203 v1(1645,5203)
JTCK: J2.3 U5.76 | length 1098.4
  Top Layer w10: U5.76@2425.44,4612.07 2688.93,4612.07 2817.75,4483.25 2817.75,4212.83 2839.2,4191.38 2896.49,4191.38 ; U5.76@2464.69,4612.07 2500.44,4612.07 ; J2.3@2917.79,4238.59 2896.49,4191.38 ; J2.3@2926.53,4233.57 2896.49,4191.38 ; J2.3@2933.11,4228 2896.49,4191.38 ; J2.3@2938.68,4221.42 2896.49,4191.38 ; J2.3@2943.7,4212.68 2896.49,4191.38
JTDI: J2.4 U5.77 | length 1000.3
  Top Layer w10: U5.77@2425.44,4631.76 2713.24,4631.76 2854.37,4490.63 J2.4@2854.37,4228 ; U5.77@2464.69,4631.76 2500.44,4631.76 ; J2.4@2836.03,4231.23 2854.37,4281.62 ; J2.4@2845.78,4228.69 2854.37,4281.62 ; J2.4@2862.96,4228.69 2854.37,4281.62 ; J2.4@2872.71,4231.23 2854.37,4281.62
JTDO: J2.5 U5.89 | length 1501.9
  Top Layer w10: v6@2317.25,4859.01 2335.98,4867.98 ; v6(2321.3,4853.3) 2335.98,4867.98 ; v6@2327.01,4849.25 2335.98,4867.98 ; 2350.44,4867.98 U5.89@2386.19,4867.98 ; U5.89@2425.44,4867.98 2335.98,4867.98
  Bottom Layer w10: v6@2317.4,4859.11 2334,4866 ; v6(2321.3,4853.3) 2334,4866 ; v6@2327.11,4849.4 2334,4866 ; J2.5@2757.08,4226.4 2761,4289.12 ; J2.5@2767.13,4226.57 2761,4289.12 ; J2.5@2783.86,4230.58 2761,4289.12 ; J2.5@2792.9,4234.97 2761,4289.12 ; 2334,4866 2548,4866 2761,4653 2761,4242.63 J2.5@2775.63,4228 2761,4289.12
JTMS: J2.2 U5.72 | length 1439.1
  Top Layer w10: 2299.46,4470.15 U5.72@2299.46,4505.9 ; U5.72@2299.46,4545.15 2299.46,4211.69 2340.15,4171 2954.85,4171 J2.2@3011.85,4228 2967.02,4183.17 ; J2.2@2996.89,4239.09 2967.02,4183.17 ; J2.2@3005.35,4233.67 2967.02,4183.17 ; J2.2@3017.52,4221.5 2967.02,4183.17 ; J2.2@3022.94,4213.04 2967.02,4183.17
KEYSWIN_ED: C51.1 J16.2 R60.1 U5.61 | length 9907.9
  Top Layer w10: 2082.93,4470.15 U5.61@2082.93,4505.9 ; U5.61@2082.93,4545.15 2082.93,4278.99 2108,4253.91 2108,4149.81 2279.81,3978 4049,3978 v1(4095,4024) 4058.79,3987.79 ; v1@4087.27,4030.35 4058.79,3987.79 ; v1@4101.35,4016.27 4058.79,3987.79 ; v1@4103.06,4886.11 4113,4930 v1@4122.94,4886.11 ; v1(4113,4885) 4113,5268 4182,5337 4182,5388 ; v1@4167.24,5400.83 4182,5357.51 ; v1@4169,5397 4182,5388 ; 4182,5357.51 v1(4177,5403) 4182,5388 ; 4182,5357.51 4187,5403 4182,5388
  Top Layer w12: C51.1@6863.37,4436.38 C51.1@6878.83,4424.67 ; C51.1@6863.37,4447.82 C51.1@6878.83,4459.53 ; C51.1@6876.22,4442.1 6935.84,4442.1 ; C51.1@6879.1,4440.14 C51.1@6878.83,4459.53 ; C51.1@6879.1,4444.06 C51.1@6878.83,4424.67 ; R60.1@6969.63,4463.26 6913.56,4442.1 ; R60.1@6971.92,4428.47 6913.56,4442.1 ; R60.1@6973.36,4446.04 6913.56,4442.1 ; R60.1@6981.23,4446.04 7040.85,4446.04 ; R60.1@6983.84,4428.61 7040.85,4446.04 ; R60.1@6983.84,4463.47 7040.85,4446.04 ; J16.2@7126.32,4286.14 7087.71,4293.88 ; J16.2@7126.32,4301.62 7087.71,4293.88 ; J16.2@7127.09,4293.88 7087.71,4293.88 ; J16.2@7162.52,4293.88 7087.71,4293.88 ; v1(6870.32,4442.1) 6921.32,4442.1 ; v1(6870.32,4442.1) C51.1@6878.83,4424.67 ; v1(6870.32,4442.1) 6935.84,4442.1 ; v1(6870.32,4442.1) C51.1@6878.83,4459.53 ; v1(6870.32,4442.1) 6935.84,4442.1 ; v1(6870.32,4442.1) 6973.36,4442.1 R60.1@6977.3,4446.04 7045.55,4446.04 7067.3,4424.3 7067.3,4314.3 7087.71,4293.88 ; C51.1@6878.83,4424.67 6935.84,4442.1 ; C51.1@6878.83,4459.53 6935.84,4442.1 ; 6921.32,4442.1 6871.11,4433.14 6921.32,4442.1 ; 6921.32,4442.1 6871.11,4451.06 6921.32,4442.1 ; 6935.84,4442.1 6870.93,4433.12 6935.84,4442.1 ; 6935.84,4442.1 6870.93,4451.08 6935.84,4442.1
  Bottom Layer w10: v1(4095,4024) 4104,4033 4104,4153.54 4085.73,4171.82 4085.73,4838.18 4113,4865.46 ; 4113,4865.46 v1(4113,4885) ; 4113,4865.46 4103.33,4882.44 4113,4865.46 ; 4113,4865.46 4122.67,4882.44 4113,4865.46 ; 4113,4865.46 v1(4113,4885) ; 4113,4865.46 v1(4113,4885)
  Bottom Layer w12: v1@4172.03,5410.5 4193,5419 ; v1(4177,5403) 4193,5419 ; v1@4184.5,5398.03 4193,5419 ; v1@6869.52,4433.14 6819.32,4442.1 v1@6869.52,4451.06 ; v1(6870.32,4442.1) 6735.9,4442.1 6629,4549 6629,5121 6331,5419 4193,5419
KEYSWIN_EL: C54.1 J16.3 R66.1 U5.60 | length 10444
  Top Layer w10: 2063.24,4470.15 U5.60@2063.24,4505.9 ; U5.60@2063.24,4545.15 2063.24,4273.22 2090,4246.46 2090,4142.35 2272.35,3960 4089,3960 v1(4131,4002) 4094.79,3965.79 ; v1@4123.27,4008.35 4094.79,3965.79 ; v1@4137.35,3994.27 4094.79,3965.79 ; v1@4141.06,4879.11 4151,4923 v1@4160.94,4879.11 ; v1(4151,4878) 4151,5266 4225,5340 v1(4225,5349) 4193.42,5308.42 ; v1@4216.55,5354.34 4193.42,5308.42 ; v1@4232.26,5342.12 4193.42,5308.42
  Top Layer w12: C54.1@6656.35,4234.51 C54.1@6671.81,4222.8 ; C54.1@6656.35,4245.95 C54.1@6671.81,4257.66 ; C54.1@6669.2,4240.23 6728.82,4240.23 ; C54.1@6672.08,4238.27 C54.1@6671.81,4257.66 ; C54.1@6672.08,4242.19 C54.1@6671.81,4222.8 ; R66.1@6759.03,4253.11 6795.3,4297.3 ; R66.1@6762.61,4261.39 6706.54,4240.23 ; R66.1@6764.9,4226.6 6706.54,4240.23 ; R66.1@6766.34,4244.17 6706.54,4240.23 ; R66.1@6774.21,4244.17 6795.3,4297.3 ; R66.1@6791.4,4240.27 6795.3,4297.3 ; J16.3@7122.54,4228.51 7082.29,4262.3 ; J16.3@7130.66,4241.74 7082.29,4262.3 ; J16.3@7162.52,4234.82 7109.77,4234.82 ; v1(6663.3,4240.23) 6714.3,4240.23 ; v1(6663.3,4240.23) C54.1@6671.81,4222.8 ; v1(6663.3,4240.23) 6728.82,4240.23 ; v1(6663.3,4240.23) C54.1@6671.81,4257.66 ; v1(6663.3,4240.23) 6728.82,4240.23 ; v1(6663.3,4240.23) 6766.34,4240.23 R66.1@6770.27,4244.17 ; C54.1@6671.81,4222.8 6728.82,4240.23 ; C54.1@6671.81,4257.66 6728.82,4240.23 ; 6714.3,4240.23 6664.09,4231.26 6714.3,4240.23 ; 6714.3,4240.23 6664.09,4249.19 6714.3,4240.23 ; 6728.82,4240.23 6663.92,4231.25 6728.82,4240.23 ; 6728.82,4240.23 6663.92,4249.21 6728.82,4240.23 ; R66.1@6770.27,4244.17 6770.27,4272.27 ; R66.1@6770.27,4244.17 6770.27,4272.27 ; 6770.27,4272.27 6787.01,4249.69 6770.27,4272.27 ; 6770.27,4272.27 6753.54,4249.69 6770.27,4272.27 ; 6770.27,4272.27 6795.3,4297.3 ; 6795.3,4297.3 7047.3,4297.3 7109.77,4234.82 ; 7082.29,4262.3 J16.3@7127.09,4234.82 ; 7109.77,4234.82 J16.3@7127.09,4234.82 ; 7109.77,4234.82 7125.34,4242.4 7109.77,4234.82 ; 7109.77,4234.82 7125.34,4227.24 7109.77,4234.82 ; 7109.77,4234.82 J16.3@7127.09,4234.82
  Bottom Layer w10: v1@4121.06,4003.11 4131,4047 v1@4140.94,4003.11 ; v1(4131,4002) 4131,4152 4103.73,4179.27 4103.73,4830.73 v1(4151,4878)
  Bottom Layer w12: v1@4220.1,5356.55 4263,5379 ; v1@4231.21,5342.48 4263,5379 ; v1@6656.45,4234.39 6622.84,4280.69 ; v1@6669.14,4247.07 6622.84,4280.69 ; 4263,5379 v1(4225,5349) 4233,5349 4263,5379 ; 4263,5379 6314.43,5379 6589,5104.43 6589,4314.53 v1(6663.3,4240.23) 6622.84,4280.69
KEYSWIN_EM: C60.1 J16.5 R78.1 U5.62 | length 10344.8
  Top Layer w10: 2102.61,4470.15 U5.62@2102.61,4505.9 ; U5.62@2102.61,4545.15 2102.61,4284.76 2126,4261.37 2126,4157.27 2287.27,3996 4008,3996 ; v1@4033.8,4029.94 4008,3996 ; v1@4038,4026 4008,3996 ; v1(4041,4023) 4008,3996 ; v1@4046.38,4014.57 4008,3996 ; v1@4065.06,4880.11 4075,4924 v1@4084.94,4880.11 ; v1(4075,4879) 4075,5278 ; v1@4103.27,5320.34 4075,5278 ; v1@4117.34,5306.27 4075,5278 ; 4075,5278 v1(4111,5314) 4075,5278
  Top Layer w12: v5@6854.79,4070.52 C60.1@6856.21,4033.83 ; v5@6854.96,4061.4 C60.1@6873.32,4029.6 ; v5@6859.37,4053.41 C60.1@6890.42,4033.83 ; C60.1@6865.24,4049.12 6931.49,4028.5 ; v5@6866.35,4065.65 C60.1@6873.32,4029.6 ; v5@6866.84,4068.97 C60.1@6856.21,4033.83 ; v5@6867.46,4062.48 C60.1@6890.42,4033.83 ; v5@6869.8,4060.26 6931.49,4028.5 ; C60.1@6873.32,4021.73 6877.25,4025.67 R78.1@6980.3,4025.67 6994.67,4025.67 7085.71,4116.71 ; v5@6877.42,4071.99 6931.49,4028.5 ; v5@6879.17,4062.48 C60.1@6856.21,4033.83 ; C60.1@6879.22,4029.6 6939,4025.67 ; v5@6879.79,4068.97 C60.1@6890.42,4033.83 ; v5@6880.28,4065.65 C60.1@6873.32,4029.6 ; C60.1@6880.66,4012.04 6939,4025.67 ; C60.1@6882.95,4046.82 6939,4025.67 ; v5@6885.75,4080.68 6931.49,4028.5 ; v5@6887.26,4053.41 C60.1@6856.21,4033.83 ; v5@6891.67,4061.4 C60.1@6873.32,4029.6 ; v5@6891.85,4070.52 C60.1@6890.42,4033.83 ; R78.1@6973.75,4008.24 6916.74,4025.67 ; R78.1@6973.75,4043.09 6916.74,4025.67 ; R78.1@6974.93,4040.63 7039.18,4070.18 ; R78.1@6976.36,4025.67 6916.74,4025.67 ; R78.1@6984.23,4025.67 7039.18,4070.18 ; R78.1@6996.94,4013.46 7039.18,4070.18 ; J16.5@7126.36,4108.97 7085.71,4116.71 ; J16.5@7126.36,4124.46 7085.71,4116.71 ; J16.5@7127.09,4116.71 7085.71,4116.71 ; J16.5@7162.52,4116.71 7085.71,4116.71 ; C60.1@6856.21,4033.83 v5(6873.32,4066.32) ; C60.1@6873.32,4029.6 v5(6873.32,4066.32) ; v5(6873.32,4066.32) 6931.49,4028.5 ; v5(6873.32,4066.32) C60.1@6890.42,4033.83
  Bottom Layer w10: v1@4036.05,4031.69 4082.28,4052.28 ; v1@4047.56,4015.45 4082.28,4052.28 ; v1(4075,4879) 4067.73,4871.73 4067.73,4164.36 4086,4146.09 4086,4056 4053,4023 v1(4041,4023) 4082.28,4052.28
  Bottom Layer w12: v1@4105.73,5306.7 4131,5294 ; v1(4111,5314) 4131,5294 ; v1@4118.3,5319.27 4131,5294 ; v5@6870.36,4047.55 6812.32,4066.32 ; v5@6870.36,4085.08 6812.32,4066.32 ; v5@6872.91,4059.33 6812.32,4066.32 ; v5@6872.91,4073.3 6812.32,4066.32 ; v5(6873.32,4066.32) 6682.68,4066.32 6541,4208 6541,5095.86 6300.86,5336 4294,5336 4252,5294 4131,5294
KEYSWIN_ER: C57.1 J16.4 R72.1 U5.81 | length 7908.1
  Top Layer w10: U5.81@2425.44,4710.5 2426.38,4709.56 3739.93,4709.56 3984,4953.63 3984,5328 3979,5323 v1(3978,5323) 3984,5277.19 ; U5.81@2464.69,4710.5 2500.45,4709.56 ; v1@3968.28,5320.64 3984,5277.19 ; v1@3988,5323.22 3984,5277.19
  Top Layer w12: C57.1@6866.37,4234.51 C57.1@6881.83,4222.8 ; C57.1@6866.37,4245.95 C57.1@6881.83,4257.66 ; C57.1@6879.22,4240.23 6938.84,4240.23 ; C57.1@6882.1,4238.27 C57.1@6881.83,4257.66 ; C57.1@6882.1,4242.19 C57.1@6881.83,4222.8 ; R72.1@6972.63,4261.39 6916.56,4240.23 ; R72.1@6974.92,4226.6 6916.56,4240.23 ; R72.1@6976.36,4244.17 6916.56,4240.23 ; R72.1@6984.23,4244.17 7014.42,4244.17 ; R72.1@6989.38,4227.31 7014.42,4244.17 ; R72.1@6989.38,4261.02 7014.42,4244.17 ; J16.4@7126.41,4168.02 7082.82,4175.77 ; J16.4@7126.41,4183.52 7082.82,4175.77 ; J16.4@7127.09,4175.77 7082.82,4175.77 ; J16.4@7162.52,4175.77 7082.82,4175.77 ; v1(6873.32,4240.23) 6924.32,4240.23 ; v1(6873.32,4240.23) C57.1@6881.83,4222.8 ; v1(6873.32,4240.23) 6938.84,4240.23 ; v1(6873.32,4240.23) C57.1@6881.83,4257.66 ; v1(6873.32,4240.23) 6938.84,4240.23 ; v1(6873.32,4240.23) 6976.36,4240.23 R72.1@6980.3,4244.17 7014.42,4244.17 ; C57.1@6881.83,4222.8 6938.84,4240.23 ; C57.1@6881.83,4257.66 6938.84,4240.23 ; 6924.32,4240.23 6874.11,4231.26 6924.32,4240.23 ; 6924.32,4240.23 6874.11,4249.19 6924.32,4240.23 ; 6938.84,4240.23 6873.93,4231.25 6938.84,4240.23 ; 6938.84,4240.23 6873.93,4249.21 6938.84,4240.23 ; 7014.42,4244.17 7082.82,4175.77
  Bottom Layer w12: v1@3972.73,5330.3 3998,5343 ; v1(3978,5323) 3998,5343 ; v1@3985.3,5317.73 3998,5343 ; v1@6866.29,4245.86 6844.32,4211.23 ; v1(6873.32,4240.23) 6844.32,4211.23 ; v1@6878.94,4233.21 6844.32,4211.23 ; 3998,5343 4158,5343 4181,5320 4249.72,5320 4288.72,5359 6306.15,5359 6569,5096.15 6569,4293.52 6651.29,4211.23 6844.32,4211.23
KEYSWIN_EU: C48.1 J16.1 R55.1 U5.82 | length 8122.6
  Top Layer w10: U5.82@2425.44,4730.18 3735.1,4730.18 3938,4933.09 3938,5333 v1(3939,5334) 3938,5288.97 ; U5.82@2464.69,4730.18 2500.44,4730.18 ; v1@3929.04,5333.11 3938,5288.97 ; v1@3948.91,5332.67 3938,5288.97
  Top Layer w12: C48.1@6653.05,4447.44 C48.1@6667.64,4459.66 ; C48.1@6653.65,4436.03 C48.1@6669.93,4424.88 ; C48.1@6660.57,4451.1 6711.24,4445.06 ; C48.1@6661.61,4433.2 6711.24,4445.06 ; C48.1@6661.76,4433.22 6711.8,4446.04 ; C48.1@6666.2,4442.1 6725.98,4446.04 ; C48.1@6668.94,4444.59 C48.1@6669.93,4424.88 ; C48.1@6669.18,4440.69 C48.1@6667.64,4459.66 ; R55.1@6760.22,4459.81 6807.53,4486.3 ; R55.1@6760.73,4428.61 6703.72,4446.04 ; R55.1@6760.73,4463.46 6703.72,4446.04 ; R55.1@6763.34,4446.04 6703.72,4446.04 ; R55.1@6771.21,4446.04 6807.53,4486.3 ; R55.1@6786.04,4436.51 6807.53,4486.3 ; J16.1@7122.49,4346.66 7087.3,4377.3 ; J16.1@7130.59,4359.88 7087.3,4377.3 ; J16.1@7162.52,4352.93 7111.66,4352.93 ; v1(6660.3,4442.1) 6711.8,4446.04 ; v1(6660.3,4442.1) 6711.24,4445.06 ; v1(6660.3,4442.1) C48.1@6669.93,4424.88 ; v1(6660.3,4442.1) 6725.98,4446.04 ; v1(6660.3,4442.1) C48.1@6667.64,4459.66 ; v1(6660.3,4442.1) 6725.98,4446.04 ; v1(6660.3,4442.1) 6664.23,4446.04 R55.1@6767.27,4446.04 6807.53,4486.3 ; C48.1@6660.39,4451.1 6711.8,4446.04 ; C48.1@6660.37,4451.1 6725.98,4446.04 ; C48.1@6660.37,4451.1 6725.98,4446.04 ; C48.1@6667.64,4459.66 6725.98,4446.04 ; C48.1@6669.93,4424.88 6725.98,4446.04 ; 6725.98,4446.04 6661.45,4433.17 6725.98,4446.04 ; 6807.53,4486.3 7053.3,4486.3 7087.3,4452.3 7087.3,4377.3 ; 7087.3,4377.3 J16.1@7127.09,4352.93 ; 7087.3,4377.3 7111.66,4352.93 ; 7111.66,4352.93 J16.1@7127.09,4352.93 ; 7111.66,4352.93 7125.13,4360.46 7111.66,4352.93 ; 7111.66,4352.93 7125.13,4345.4 7111.66,4352.93 ; 7111.66,4352.93 J16.1@7127.09,4352.93
  Bottom Layer w12: v1@3933.37,5341.02 3968,5363 ; v1(3939,5334) 3968,5363 ; v1@3946.02,5328.37 3968,5363 ; v1@6653.45,4436.26 6619.84,4482.56 ; v1@6666.14,4448.94 6619.84,4482.56 ; 3968,5363 4195,5363 4231,5399 6322.72,5399 6609,5112.72 6609,4493.39 v1(6660.3,4442.1) 6619.84,4482.56
KEYSWIN_FD: C52.1 J15.2 R61.1 U5.33 | length 4467
  Top Layer w10: J15.2@-111.93,4116.71 -41.71,4116.71 ; J15.2@-76.5,4116.71 -41.71,4116.71 ; J15.2@-75.39,4108 -41.71,4116.71 ; J15.2@-75.39,4125.42 -41.71,4116.71 ; C52.1@87.12,4005.74 51.14,4023.86 ; C52.1@87.12,4041.98 51.14,4023.86 ; C52.1@90.5,4015.29 51.14,4023.86 ; C52.1@90.5,4032.43 51.14,4023.86 ; C52.1@91.42,4023.86 51.14,4023.86 ; C52.1@103.23,4023.86 156.85,4023.86 ; C52.1@103.92,4015.27 156.85,4023.86 ; C52.1@103.92,4032.46 156.85,4023.86 ; C52.1@106.46,4005.52 156.85,4023.86 ; C52.1@106.46,4042.2 156.85,4023.86 ; R61.1@199.14,4001.87 149.87,4023.86 ; R61.1@201.81,4038.45 149.87,4023.86 ; R61.1@202.37,4011.4 149.87,4023.86 ; R61.1@203.62,4028.55 149.87,4023.86 ; R61.1@203.68,4019.93 149.87,4023.86 ; R61.1@214.18,4010.11 169.37,4023.86 ; R61.1@214.44,4010.06 171.01,4022.31 ; R61.1@215.49,4029.91 171.01,4022.31 ; R61.1@215.85,4029.92 169.37,4023.86 ; R61.1@215.89,4029.92 150.48,4023.72 ; R61.1@215.91,4029.92 149.87,4023.86 ; v1(1143,4855) 1148.46,4855 1278.46,4985 1629.59,4985 1667.87,4946.72 U5.33@1819.15,4946.72 ; 1744.15,4946.72 U5.33@1779.9,4946.72 ; -41.71,4116.71 51.14,4023.86 ; 51.14,4023.86 C52.1@97.33,4023.86 203.68,4023.86 R61.1@207.62,4019.93 v1(216.07,4019.93) ; 149.87,4023.86 v1(216.07,4019.93) ; 149.87,4023.86 214.73,4010.02 150.48,4023.72 ; 150.48,4023.72 v1(216.07,4019.93) ; 169.37,4023.86 v1(216.07,4019.93) ; 171.01,4022.31 v1(216.07,4019.93)
  Bottom Layer w10: v1(216.07,4019.93) 384.67,4019.93 412.67,4047.93 435.86,4047.93 445.86,4037.93 750.93,4037.93 824,4111 824,4366.46 834,4376.46 834,4625.46 1063.54,4855 v1(1143,4855) 1098,4855 ; v1@217.19,4009.99 261.07,4019.93 v1@217.19,4029.86 ; v1@1141.89,4845.06 1098,4855 ; v1@1141.89,4864.94 1098,4855
KEYSWIN_FL: C55.1 J15.3 R67.1 U5.32 | length 4787.7
  Top Layer w10: J15.3@-111.93,4175.77 269.77,4175.77 313.97,4219.97 C55.1@313.97,4236.86 R67.1@420.33,4236.86 ; J15.3@-76.5,4175.77 -32.72,4175.77 ; J15.3@-75.62,4167.03 -32.72,4175.77 ; J15.3@-75.62,4184.5 -32.72,4175.77 ; C55.1@290.55,4243.17 279.77,4185.77 ; C55.1@300.24,4240.47 279.77,4185.77 ; C55.1@308.07,4236.86 279.77,4185.77 ; C55.1@315.28,4232.14 279.77,4185.77 ; C55.1@319.88,4236.86 373.5,4236.86 ; C55.1@320.57,4228.27 373.5,4236.86 ; C55.1@320.57,4245.45 373.5,4236.86 ; C55.1@322.71,4225.36 279.77,4185.77 ; C55.1@323.11,4218.52 373.5,4236.86 ; C55.1@323.11,4255.2 373.5,4236.86 ; R67.1@414.27,4232.49 R67.1@418.46,4251.45 ; R67.1@414.43,4234.77 R67.1@415.78,4214.86 ; R67.1@419.01,4224.4 366.52,4236.86 ; R67.1@420.27,4241.55 366.52,4236.86 ; R67.1@420.33,4232.92 366.52,4236.86 ; R67.1@422.2,4223.14 377.06,4237.78 ; R67.1@422.32,4223.11 378.75,4236.86 ; R67.1@422.49,4223.08 379.33,4235.92 ; R67.1@422.89,4223.02 376.55,4234.48 ; R67.1@423.54,4242.9 376.55,4234.48 ; R67.1@423.82,4242.91 379.33,4235.92 ; R67.1@424.03,4242.92 378.75,4236.86 ; R67.1@424.23,4242.92 377.06,4237.78 ; R67.1@431.96,4226.54 R67.1@415.78,4214.86 ; R67.1@432.71,4238.27 R67.1@418.46,4251.45 ; v1(1140,4901) 1169,4901 ; v1@1141.72,4891.15 1169,4901 ; v1@1141.72,4910.85 1169,4901 ; 1744.15,4966.4 U5.32@1779.9,4966.4 ; U5.32@1819.15,4966.4 1677.19,4966.4 1633.3,5010.3 1278.3,5010.3 1169,4901 ; 366.52,4236.86 v1(424.26,4232.92) ; 366.52,4236.86 424.08,4242.92 366.52,4236.86 ; 366.52,4236.86 422.72,4223.04 366.52,4236.86 ; 366.52,4236.86 v1(424.26,4232.92) ; 366.52,4236.86 R67.1@418.46,4251.45 ; 366.52,4236.86 R67.1@415.78,4214.86 ; 376.55,4234.48 v1(424.26,4232.92) ; 377.06,4237.78 v1(424.26,4232.92) ; 378.75,4236.86 v1(424.26,4232.92) ; 379.33,4235.92 v1(424.26,4232.92) ; R67.1@415.78,4214.86 v1(424.26,4232.92) ; R67.1@418.46,4251.45 v1(424.26,4232.92)
  Bottom Layer w10: v1@414.32,4234.03 424.26,4277.92 v1@434.2,4234.03 ; v1(424.26,4232.92) 424.26,4338.26 446,4360 772.6,4360 816,4403.4 816,4632.91 1084.09,4901 v1@1126,4901 ; v1@1138.89,4891.06 1095,4901 ; v1@1138.89,4910.94 1095,4901 ; v1(1140,4901) 1095,4901
KEYSWIN_FM: C61.1 J15.5 R79.1 U5.31 | length 4703.5
  Top Layer w10: J15.5@-111.93,4293.88 -37.12,4293.88 ; J15.5@-76.5,4293.88 -37.12,4293.88 ; J15.5@-75.52,4285.15 -37.12,4293.88 ; J15.5@-75.52,4302.6 -37.12,4293.88 ; C61.1@290.44,4462.35 280.65,4404.65 ; C61.1@300.17,4459.83 280.65,4404.65 ; C61.1@308.07,4456.36 280.65,4404.65 ; C61.1@315.37,4451.77 280.65,4404.65 ; C61.1@319.88,4456.36 373.5,4456.36 ; C61.1@320.57,4447.77 373.5,4456.36 ; C61.1@320.57,4464.95 373.5,4456.36 ; C61.1@322.92,4445.13 280.65,4404.65 ; C61.1@323.11,4438.02 373.5,4456.36 ; C61.1@323.11,4474.7 373.5,4456.36 ; R79.1@414.27,4460.73 R79.1@418.46,4441.77 ; R79.1@414.44,4458.45 R79.1@415.78,4478.35 ; R79.1@419.01,4468.82 366.52,4456.36 ; R79.1@420.27,4451.67 366.52,4456.36 ; R79.1@420.33,4456.36 C61.1@313.97,4456.36 313.97,4437.97 273,4397 66,4397 -37.12,4293.88 ; R79.1@420.33,4460.3 366.52,4456.36 ; R79.1@422.2,4470.08 377.06,4455.44 ; R79.1@422.32,4470.1 378.75,4456.36 ; R79.1@422.5,4470.14 379.33,4457.3 ; R79.1@422.89,4470.2 376.55,4458.74 ; R79.1@423.54,4450.32 376.55,4458.74 ; R79.1@423.82,4450.31 379.33,4457.3 ; R79.1@424.03,4450.3 378.75,4456.36 ; R79.1@424.23,4450.3 377.06,4455.44 ; R79.1@431.96,4466.68 R79.1@415.78,4478.35 ; R79.1@432.72,4454.95 R79.1@418.46,4441.77 ; v1@1169.65,4967.73 1212.21,4996.21 v1@1183.73,4953.65 ; v1(1176,4960) 1244.3,5028.3 1645.3,5028.3 1687.5,4986.09 U5.31@1819.15,4986.09 ; 1744.15,4986.09 U5.31@1779.9,4986.09 ; 366.52,4456.36 v1(424.26,4460.3) ; 366.52,4456.36 422.73,4470.18 366.52,4456.36 ; 366.52,4456.36 424.08,4450.3 366.52,4456.36 ; 366.52,4456.36 v1(424.26,4460.3) ; 366.52,4456.36 R79.1@415.78,4478.35 ; 366.52,4456.36 R79.1@418.46,4441.77 ; 376.55,4458.74 v1(424.26,4460.3) ; 377.06,4455.44 v1(424.26,4460.3) ; 378.75,4456.36 v1(424.26,4460.3) ; 379.33,4457.3 v1(424.26,4460.3) ; R79.1@415.78,4478.35 v1(424.26,4460.3) ; R79.1@418.46,4441.77 v1(424.26,4460.3)
  Bottom Layer w10: v1@414.54,4457.98 424.26,4438.74 ; v1(424.26,4460.3) 424.26,4438.74 ; v1@433.99,4457.98 424.26,4438.74 ; v1@1168.17,4966.22 1145,4929 ; v1@1182.22,4952.17 1145,4929 ; 424.26,4438.74 462,4401 728,4401 797,4470 797,4639.37 1086.63,4929 1145,4929 ; 1145,4929 v1(1176,4960) 1145,4929
KEYSWIN_FR: C58.1 J15.4 R73.1 U5.30 | length 4622.8
  Top Layer w10: J15.4@-111.93,4234.82 95.29,4234.82 C58.1@97.33,4236.86 v1(203.68,4236.86) ; J15.4@-76.5,4234.82 -32.72,4234.82 ; J15.4@-75.62,4226.09 -32.72,4234.82 ; J15.4@-75.62,4243.56 -32.72,4234.82 ; C58.1@87.5,4255.07 37.74,4234.82 ; C58.1@88.89,4218.41 37.74,4234.82 ; C58.1@90.4,4245.42 37.74,4234.82 ; C58.1@91.05,4228.25 37.74,4234.82 ; C58.1@91.42,4236.86 37.74,4234.82 ; C58.1@103.23,4236.86 156.85,4236.86 ; C58.1@103.92,4228.27 156.85,4236.86 ; C58.1@103.92,4245.45 156.85,4236.86 ; C58.1@106.46,4218.52 156.85,4236.86 ; C58.1@106.46,4255.2 156.85,4236.86 ; R73.1@199.14,4214.86 149.87,4236.86 ; R73.1@201.81,4251.45 149.87,4236.86 ; R73.1@202.37,4224.4 149.87,4236.86 ; R73.1@202.39,4246.78 155.17,4235.6 ; R73.1@202.44,4246.78 158.29,4236.24 ; R73.1@202.57,4226.92 158.68,4236.86 R73.1@202.57,4246.8 ; R73.1@202.71,4226.91 158.29,4236.24 ; R73.1@202.74,4246.82 158.14,4237.58 ; R73.1@202.91,4226.89 155.17,4235.6 ; R73.1@202.91,4246.83 154.03,4238.03 ; R73.1@203.62,4241.55 149.87,4236.86 ; R73.1@203.68,4232.92 149.87,4236.86 ; R73.1@207.62,4232.92 v1(203.68,4236.86) ; v1(787,4414) 887,4414 929,4456 929,4640.6 1057.9,4769.5 1066.1,4769.5 1097,4800.4 1097,4981 1162.3,5046.3 1659.3,5046.3 1699.82,5005.77 U5.30@1819.15,5005.77 ; v1@788.11,4404.06 832,4414 v1@788.11,4423.94 ; 1744.15,5005.77 U5.30@1779.9,5005.77 ; 154.03,4238.03 v1(203.68,4236.86) ; 154.03,4238.03 202.44,4226.94 158.14,4237.58 ; 155.17,4235.6 v1(203.68,4236.86) ; 158.14,4237.58 v1(203.68,4236.86) ; 158.29,4236.24 v1(203.68,4236.86)
  Bottom Layer w10: v1@195.68,4242.86 232.17,4283.17 ; v1@212.64,4232.43 232.17,4283.17 ; v1@779.19,4420.25 755,4382 ; v1@793.25,4406.19 755,4382 ; v1(203.68,4236.86) 203.68,4254.68 ; v1(203.68,4236.86) 232.17,4283.17 ; v1(203.68,4236.86) 203.68,4254.68 ; 203.68,4254.68 213.28,4239.67 203.68,4254.68 ; 203.68,4254.68 194.08,4239.67 203.68,4254.68 ; 203.68,4254.68 331,4382 755,4382 ; 755,4382 v1(787,4414) 755,4382
KEYSWIN_FU: C49.1 J15.1 R56.1 U5.29 | length 5139.2
  Top Layer w10: J15.1@-111.93,4057.66 -60.66,4057.66 ; J15.1@-80.26,4049.73 -37.12,4034.12 ; J15.1@-71.3,4064.73 -37.12,4034.12 ; C49.1@293.5,4035.46 262.21,3981.21 ; C49.1@301.78,4029.76 262.21,3981.21 ; C49.1@308.07,4023.86 262.21,3981.21 ; C49.1@313.49,4017.16 262.21,3981.21 ; C49.1@318.58,4008.49 262.21,3981.21 ; C49.1@319.88,4023.86 373.5,4023.86 ; C49.1@320.57,4015.27 373.5,4023.86 ; C49.1@320.57,4032.46 373.5,4023.86 ; C49.1@323.11,4005.52 373.5,4023.86 ; C49.1@323.11,4042.2 373.5,4023.86 ; R56.1@414.27,4019.49 R56.1@418.46,4038.45 ; R56.1@414.44,4021.77 R56.1@415.78,4001.87 ; R56.1@419.01,4011.4 366.52,4023.86 ; R56.1@420.27,4028.55 366.52,4023.86 ; R56.1@420.33,4019.93 366.52,4023.86 ; R56.1@422.2,4010.14 377.06,4024.78 ; R56.1@422.32,4010.12 378.75,4023.86 ; R56.1@422.5,4010.08 379.33,4022.92 ; R56.1@422.89,4010.02 376.55,4021.48 ; R56.1@423.54,4029.9 376.55,4021.48 ; R56.1@423.82,4029.92 379.33,4022.92 ; R56.1@424.03,4029.92 378.75,4023.86 ; R56.1@424.23,4029.93 377.06,4024.78 ; R56.1@431.96,4013.54 R56.1@415.78,4001.87 ; R56.1@432.72,4025.27 R56.1@418.46,4038.45 ; v1@1044.56,4798.61 1054.5,4842.5 v1@1064.44,4798.61 ; v1(1054.5,4797.5) 1054.5,4967.5 1153.3,5066.3 1682.3,5066.3 1723.13,5025.46 U5.29@1819.15,5025.46 ; 1744.15,5025.46 U5.29@1779.9,5025.46 ; J15.1@-76.5,4057.66 -60.66,4057.66 ; J15.1@-76.5,4057.66 -37.12,4034.12 ; J15.1@-76.5,4057.66 -60.66,4057.66 ; -60.66,4057.66 -74.07,4049.22 -60.66,4057.66 ; -60.66,4057.66 -74.07,4066.09 -60.66,4057.66 ; -60.66,4057.66 21,3976 257,3976 304.86,4023.86 C49.1@313.97,4023.86 420.33,4023.86 v1(424.26,4019.93) ; 366.52,4023.86 v1(424.26,4019.93) ; 366.52,4023.86 424.08,4029.92 366.52,4023.86 ; 366.52,4023.86 422.73,4010.04 366.52,4023.86 ; 366.52,4023.86 v1(424.26,4019.93) ; 366.52,4023.86 R56.1@418.46,4038.45 ; 366.52,4023.86 R56.1@415.78,4001.87 ; 376.55,4021.48 v1(424.26,4019.93) ; 377.06,4024.78 v1(424.26,4019.93) ; 378.75,4023.86 v1(424.26,4019.93) ; 379.33,4022.92 v1(424.26,4019.93) ; R56.1@415.78,4001.87 v1(424.26,4019.93) ; R56.1@418.46,4038.45 v1(424.26,4019.93)
  Bottom Layer w10: v1(424.26,4019.93) 768.38,4019.93 842,4093.54 842,4359 852,4369 852,4618 1031.5,4797.5 ; v1@1052.33,4787.74 1031.5,4797.5 ; v1@1052.33,4807.26 1031.5,4797.5 ; 1031.5,4797.5 v1(1054.5,4797.5) 1031.5,4797.5
KEYSWIN_G1: C63.1 J9.1 R86.1 U5.63 | length 10984.2
  Top Layer w10: 2122.3,4470.15 U5.63@2122.3,4505.9 ; U5.63@2122.3,4545.15 2122.3,4290.53 2144,4268.82 2144,4164.72 2292.72,4016 3937.46,4016 3953.46,4032 ; v1@3978.48,4020.32 3953.46,4032 ; v1@3979.91,4039.94 3953.46,4032 ; C63.1@6739.67,2738.75 6761.67,2787.98 ; R86.1@6743.33,2825.12 6761.67,2774.74 ; C63.1@6749.21,2735.52 6761.67,2787.98 ; R86.1@6751.37,2851.75 6806.5,2877.13 ; R86.1@6753.07,2827.66 6761.67,2774.74 ; C63.1@6757.73,2728.3 6761.67,2732.23 R86.1@6761.67,2832.29 ; C63.1@6757.73,2734.2 6761.67,2787.98 ; R86.1@6761.67,2828.36 6761.67,2774.74 ; R86.1@6761.67,2836.23 6806.5,2877.13 ; R86.1@6765.76,2833.33 6765.93,2786.44 ; R86.1@6765.82,2833.82 6763.76,2787.67 ; C63.1@6766.35,2734.26 6761.67,2787.98 ; R86.1@6767.91,2830.29 6806.5,2877.13 ; R86.1@6767.95,2838.61 6803.58,2874.47 ; R86.1@6767.98,2838.64 6804.15,2874.78 ; R86.1@6768,2838.67 6806.13,2876.88 ; R86.1@6768.02,2838.69 6802.78,2872.61 ; R86.1@6768.15,2838.85 6803.54,2872 ; R86.1@6768.69,2839.31 6821.67,2892.3 6958.11,2892.3 6958.4,2892 6981.6,2892 6981.89,2892.3 7060.22,2892.3 J9.1@7162.52,2789.99 ; R86.1@6769.02,2824.86 R86.1@6756.32,2843 ; R86.1@6770.26,2827.66 6761.67,2774.74 ; R86.1@6776.18,2824.56 6806.5,2877.13 ; C63.1@6776.26,2736.07 6761.67,2787.98 ; R86.1@6778.44,2841.91 R86.1@6756.32,2843 ; R86.1@6780,2825.12 6761.67,2774.74 ; R86.1@6784.44,2827.43 6803.54,2872 ; R86.1@6784.45,2827.45 6806.13,2876.88 ; R86.1@6784.52,2827.57 6804.15,2874.78 ; R86.1@6784.54,2827.6 6802.78,2872.61 ; R86.1@6784.55,2827.63 6803.58,2874.47 ; R86.1@6785.03,2828.68 6763.76,2787.67 ; R86.1@6785.21,2829.18 6765.93,2786.44 ; J9.1@7155.79,2784.36 7127.53,2824.98 J9.1@7168.16,2796.72 ; 3953.46,4032 v1(3981,4030) 3979,4032 3953.46,4032 ; R86.1@6756.32,2843 v1(6775.71,2832.29) ; R86.1@6756.32,2843 6806.5,2877.13 ; 6761.67,2783.13 v1(6775.71,2832.29) ; 6761.67,2783.13 6765.87,2834.09 6761.67,2783.19 ; 6761.67,2783.13 6785.01,2828.62 6761.67,2783.19 ; 6761.67,2783.19 v1(6775.71,2832.29) ; 6763.76,2787.67 v1(6775.71,2832.29) ; 6765.93,2786.44 v1(6775.71,2832.29) ; v1(6775.71,2832.29) 6804.15,2874.78 ; v1(6775.71,2832.29) 6803.58,2874.47 ; v1(6775.71,2832.29) 6802.78,2872.61 ; v1(6775.71,2832.29) 6806.13,2876.88 ; v1(6775.71,2832.29) 6803.54,2872
  Bottom Layer w10: v1(3981,4030) 3996,4045 3996,4162.09 4013.73,4179.82 4013.73,4590.64 3996,4608.37 3996,4904.65 4138.35,5047 6259.91,5047 6310,4996.91 6310,3283 6760.71,2832.29 v1(6775.71,2832.29)